# EAGLE board TSC_PROIECT_BOARD (EAGLE 9.7.0)
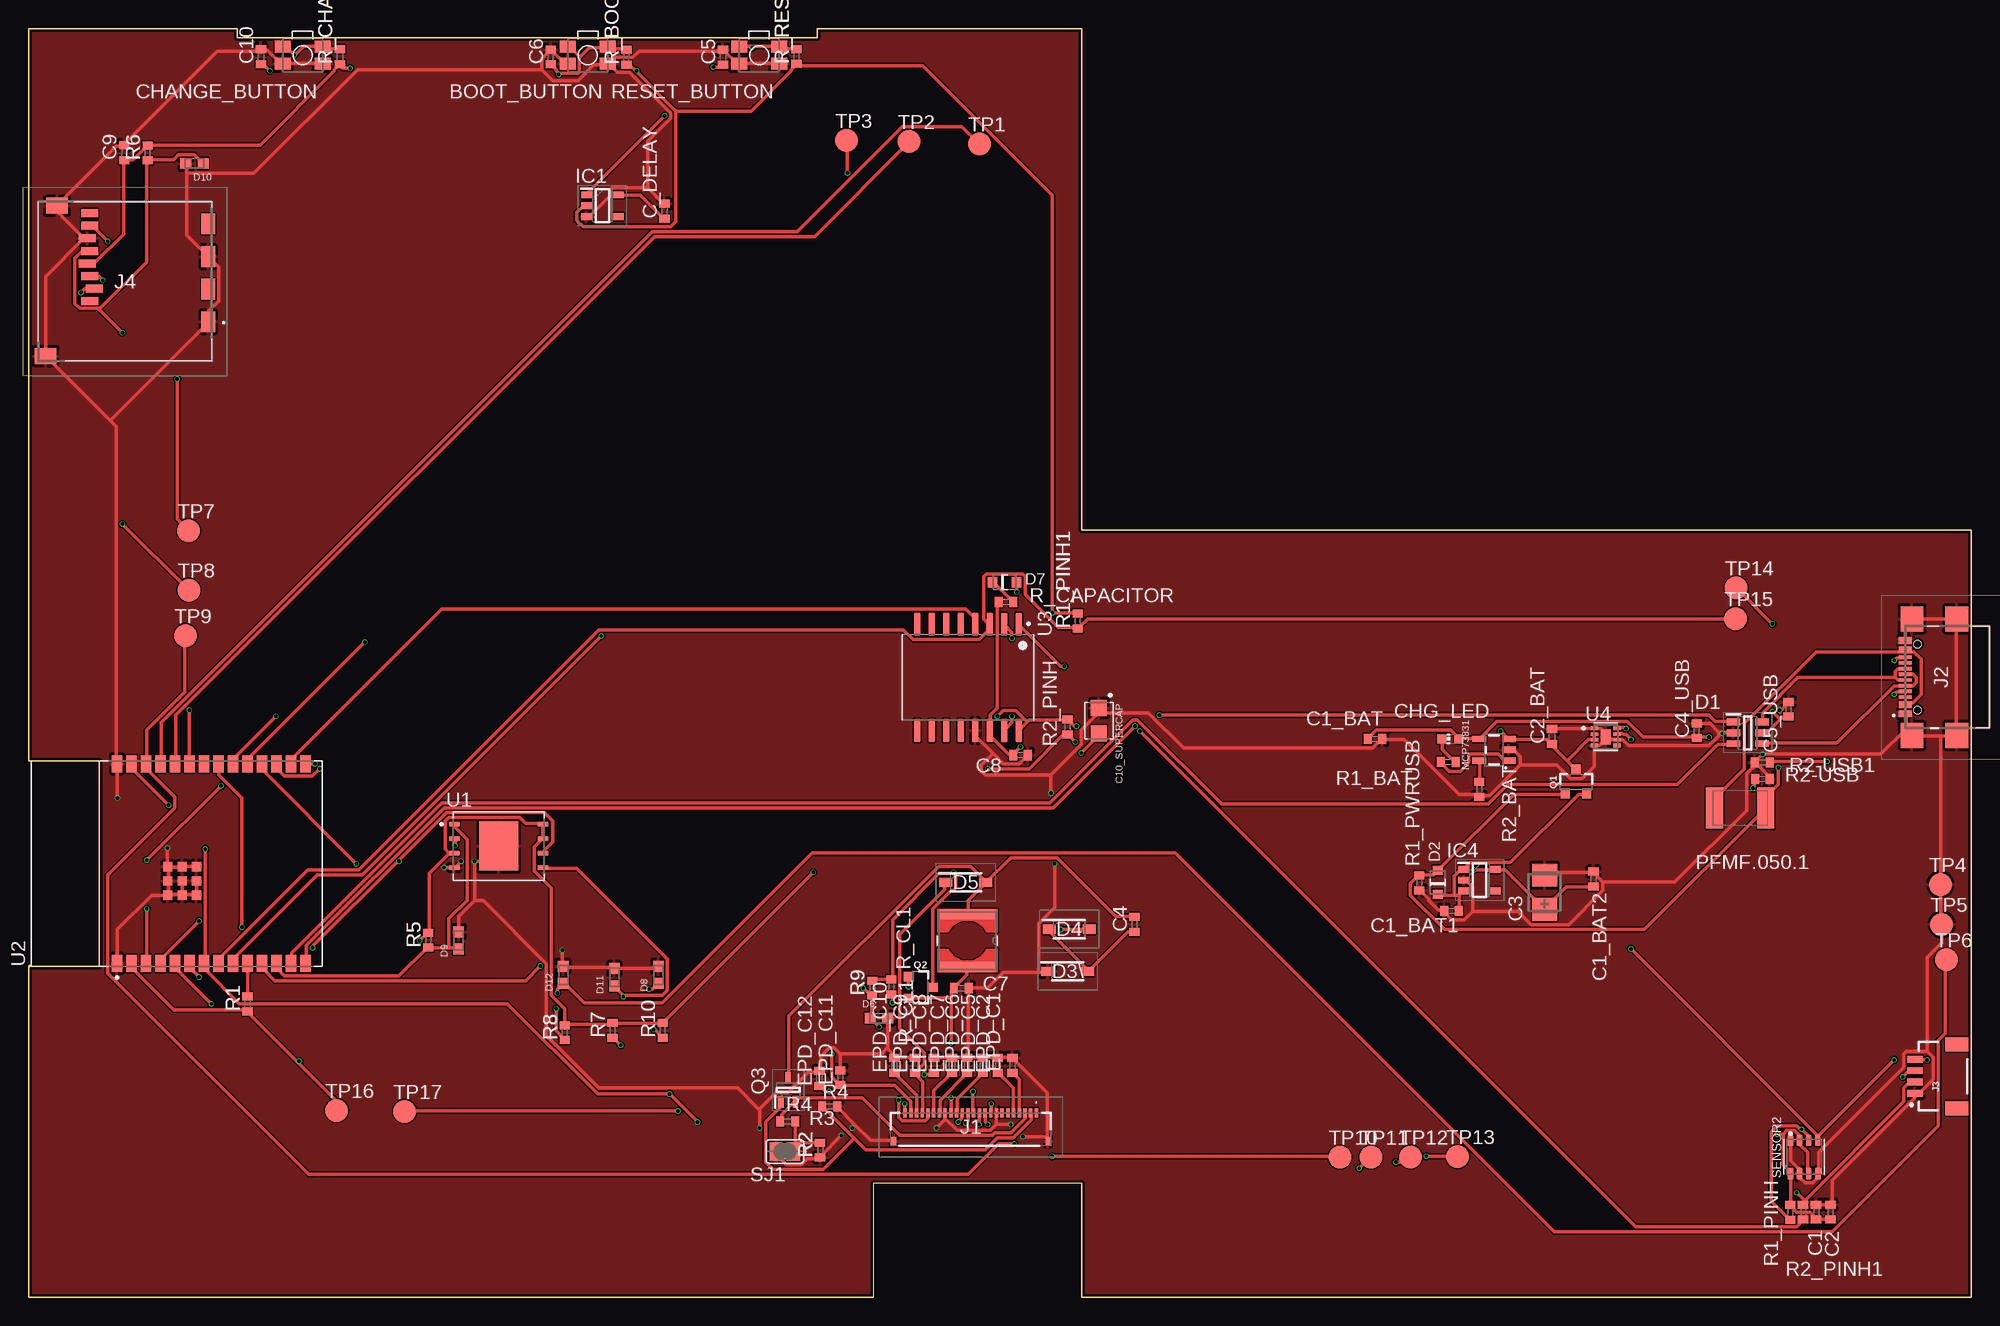
[diagram p0: board, top side]
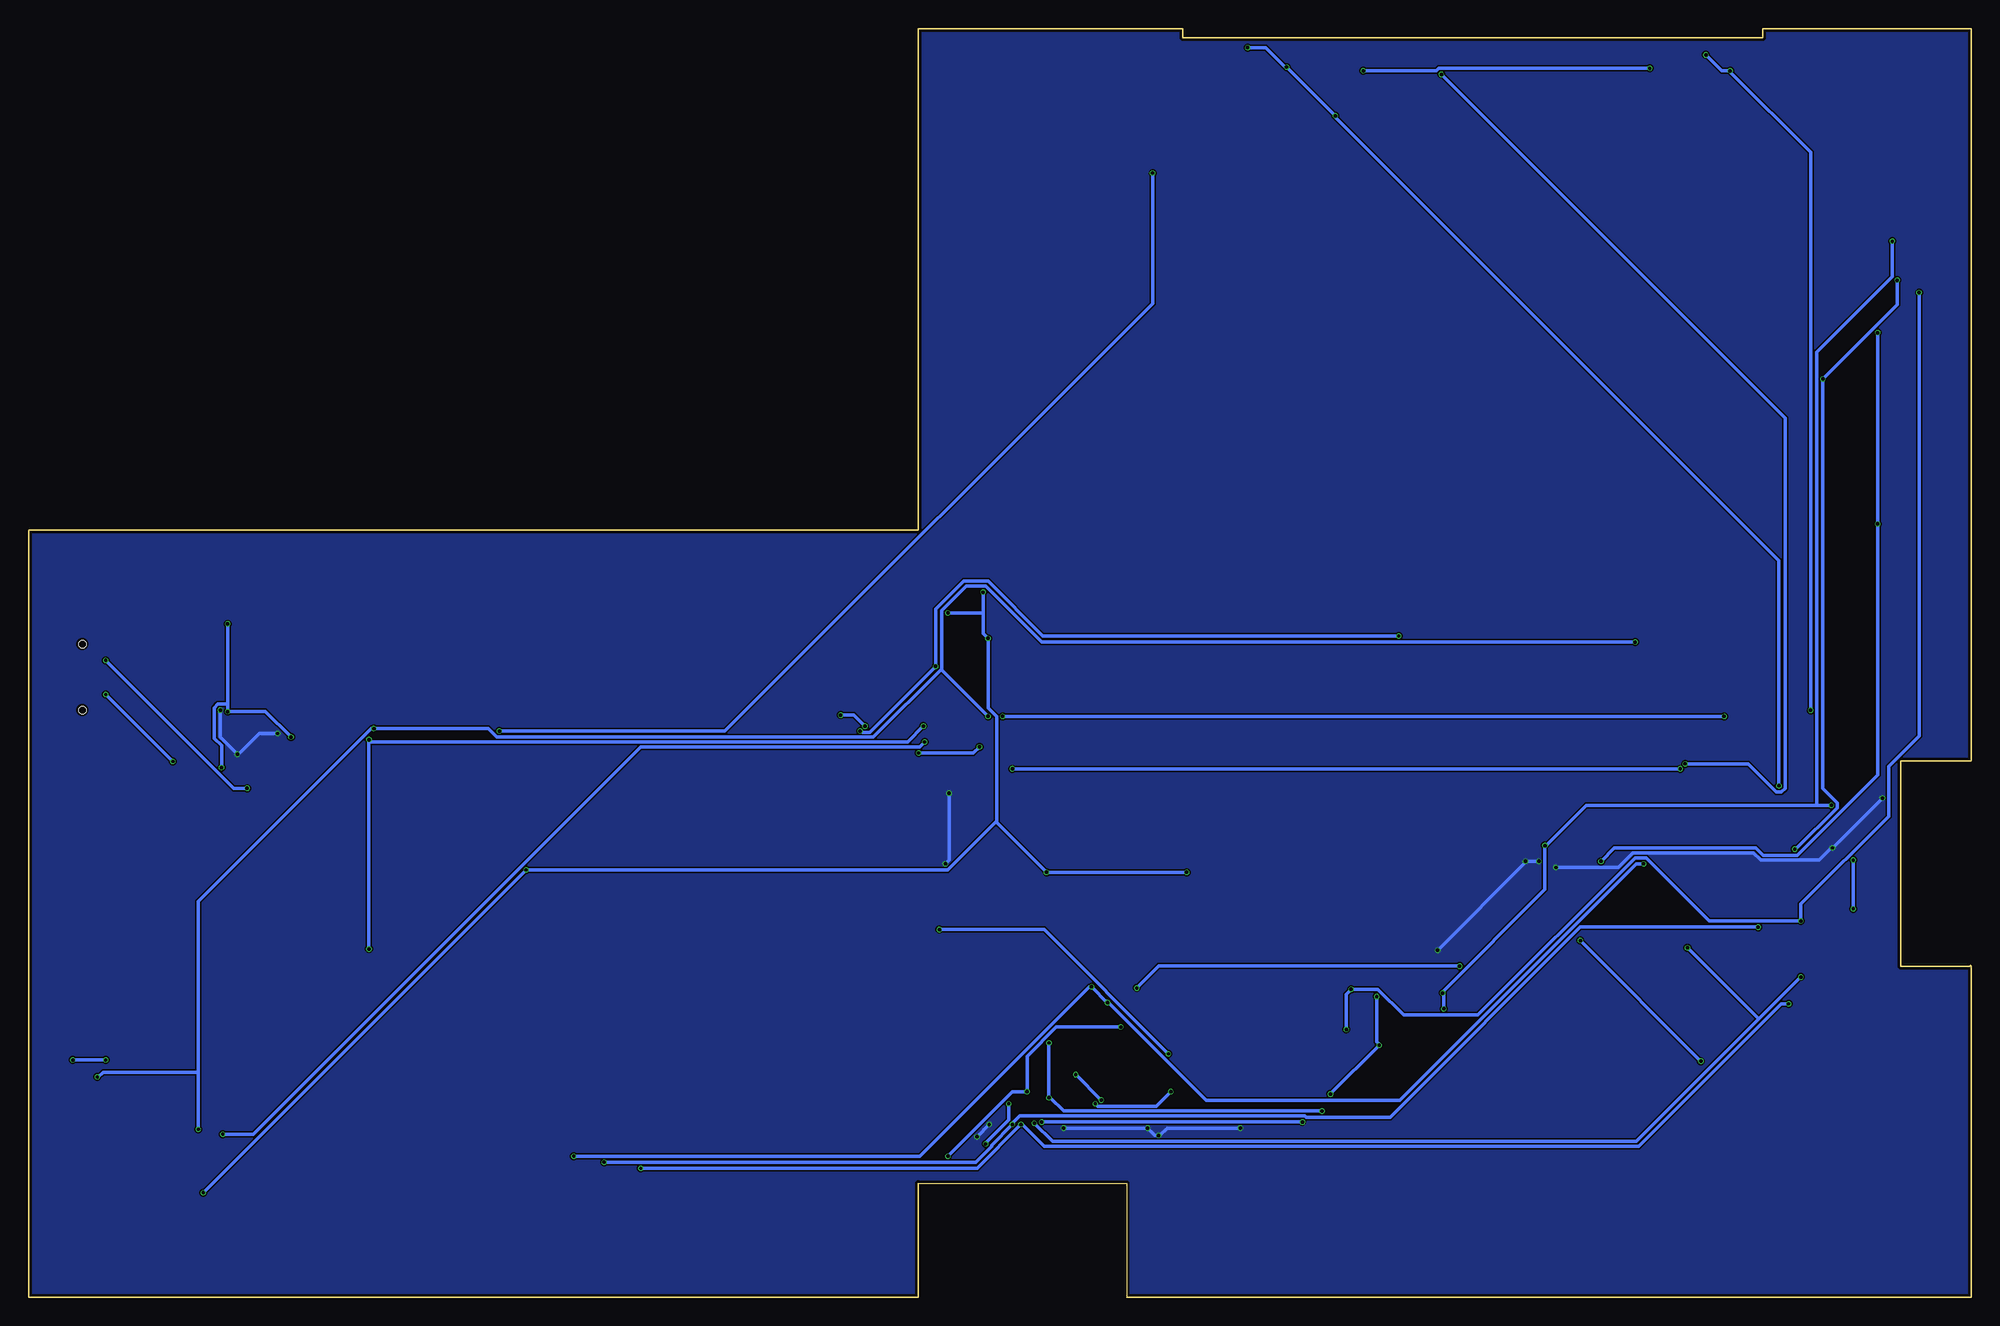
[diagram p1: board, bottom side, seen from below]

Size 170.2 x 111.2 mm. Coordinates in mm from the lower left corner, seen from the top.
Outline: 0,29 0,0 74,0 74,10 92.27,10 92.27,0 170.2,0 170.2,67.24 92.27,67.24 92.27,111.2 69.1,111.2 69.1,110.4 18.3,110.4 18.3,111.2 0,111.2 0,47 6.2,47 6.2,29 0,29
Outline: 0,29 0.1,29.1
Copper layers (1*16): Top 0.035mm / dielectric 1.6mm / Bottom 0.035mm
Design rules "jlcpcb-2layers.dru": minimum track width 0.15mm, minimum drill 0.3mm, track to track 5mil, track to pad 5mil, pad to pad 5mil, via to via 5mil, smd to smd 5mil, copper to edge 0.2mm, drill to drill 6mil, minimum pad ring 10mil, minimum via ring 3mil, stop-mask expansion 4mil, vias tented up to drill 0mil, thermal gap 10mil
Net classes: 0 default: width 0.3 mm; 1 power: width 0.3 mm

## Footprints (pad centres in the part's own frame; a part is rotated, then mirrored left to right if it is on the bottom)
MYBUTTON = smd 1.4 x 1.05: 1 1.75,0.75; 2 -1.75,0.75; 3 -1.75,-0.75; 4 1.75,-0.75
ESP32_WROVER_EAGLE-LTSPICE_C0402 = smd 0.7 x 0.9: 1 -0.65,0; 2 0.65,0
RCL_CT3528 = smd 2 x 2.2: + -1.5,0; - 1.5,0
CAPCP3225X100N = smd 1.4 x 1.4: 1 -1.1,0; 2 1.1,0
ADAFRUIT_CHIP-LED0603 = smd 0.8 x 0.8: A 0,-0.75; C 0,0.75
SOT95P280X145-6N = smd 1.2 x 0.6: 1 -1.25,0.95; 2 -1.25,0; 3 -1.25,-0.95; 4 1.25,-0.95; 5 1.25,0; 6 1.25,0.95
ESP32_WROVER_AVX---SD0805S020S1R0_AVX_SD0805S020S1R0_0 = smd 0.8 x 0.9: 1 -1.05,0; 2 1.05,0
SOD3716X135N = smd 1.15 x 0.8: 1 -1.75,0; 2 1.75,0
DIOC1608X36N = smd 0.97 x 0.94: 1 -0.75,0; 2 0.75,0
SOT95P280X125-5N = smd 0.9 x 0.6: 1 -1.4,0.95; 2 -1.4,0; 3 -1.4,-0.95; 4 1.4,-0.95; 5 1.4,0.95
SOT95P280X120-5N = smd 0.9 x 0.6: 1 -1.4,0.95; 2 -1.4,0; 3 -1.4,-0.95; 4 1.4,-0.95; 5 1.4,0.95
FH34SRJ24S05SH99 = smd 0.3 x 0.8: 1 5.75,1.45; 2 5.25,1.45; 3 4.75,1.45; 4 4.25,1.45; 5 3.75,1.45; 6 3.25,1.45; 7 2.75,1.45; 8 2.25,1.45; 9 1.75,1.45; 10 1.25,1.45; 11 0.75,1.45; 12 0.25,1.45; 13 -0.25,1.45; 14 -0.75,1.45; 15 -1.25,1.45; 16 -1.75,1.45; 17 -2.25,1.45; 18 -2.75,1.45; 19 -3.25,1.45; 20 -3.75,1.45; 21 -4.25,1.45; 22 -4.75,1.45; 23 -5.25,1.45; 24 -5.75,1.45 | smd 0.4 x 0.8: MP1 6.75,-1.05; MP2 -6.75,-1.05
SAMACSYS_PARTS_USB4110GFA = smd 0.3 x 1.15: A1 -3.35,3.678; A4 -2.55,3.678; A5 -1.25,3.678; A6 -0.25,3.678; A7 0.25,3.678; A8 1.25,3.678; A9 2.55,3.678; A12 3.35,3.678; B1 3.05,3.678; B4 2.25,3.678; B5 1.75,3.678; B6 0.75,3.678; B7 -0.75,3.678; B8 -1.75,3.678; B9 -2.25,3.678; B12 -3.05,3.678 | smd 2.18 x 2: MP1 -5.11,-0.827; MP2 5.11,-0.827; MP3 -5.11,3.103; MP4 5.11,3.103 | hole 0.65: -2.89,2.603; 2.89,2.603
JST04_1MM_RA = smd 0.6 x 1.35: 1 -1.5,0; 2 -0.5,0; 3 0.5,0; 4 1.5,0 | smd 1.2 x 2: NC1 2.8,-3.675; NC2 -2.8,-3.675
112ATAARR03ATTEND = smd 1.8 x 1.2: G1 10.6,10.4; G2 4.9,10.4; S1 7.75,10.4; S2 2.05,10.4 | smd 1.4 x 1.9: G3 13.6,-3.85; G4 0.45,-2.85 | smd 0.7 x 1.5: P1 8.8,0; P2 7.7,0.4; P3 6.6,0; P4 5.5,-0.2; P5 4.4,0; P6 3.3,-0.2; P7 2.2,0; P8 1.1,0
IND_4828-WE-TPC_WRE = smd 0.889 x 4.826: 1 -2.286,0; 2 2.286,0
ESP32_WROVER_SPARKFUN-IC-POWER_SOT23-5 = smd 0.55 x 1.2: 1 -0.95,-1.3; 2 0,-1.3; 3 0.95,-1.3; 4 0.95,1.3; 5 -0.95,1.3
ESP32C6_VARISTOR_CT/CN1812 = smd 1.5 x 3.6: 1 -2.25,0; 2 2.25,0
ESP32_WROVER_SPARKFUN-DISCRETESEMI_SOT23-3 = smd 0.8 x 0.9: 1 -0.95,-1; 2 0.95,-1; 3 0,1.1
SOT65P210X110-3N = smd 1.05 x 0.5: 1 -1.05,0.65; 2 -1.05,-0.65; 3 1.05,0
ESP32_WROVER_EAGLE-LTSPICE_R0402 = smd 0.7 x 0.9: 1 -0.65,0; 2 0.65,0
ESP32_WROVER_BME680_PSON80P300X300X100-8N = smd 1.016 x 0.5: 1 1.458,1.2; 2 1.458,0.4; 3 1.458,-0.4; 4 1.458,-1.2; 5 -1.458,-1.22; 6 -1.458,-0.4; 7 -1.458,0.4; 8 -1.458,1.2
SJ = smd 1.168 x 1.6: 1 -0.762,0; 2 0.762,0
TP20R = smd 2 x 2: TP 0,0
SON127P600X800X80-9N = smd 0.94 x 0.44: 1 -3.895,1.905; 2 -3.895,0.635; 3 -3.895,-0.635; 4 -3.895,-1.905; 5 3.895,-1.905; 6 3.895,-0.635; 7 3.895,0.635; 8 3.895,1.905 | smd 3.4 x 4.3: 9 0,0
XCVR_ESP32-C6-WROOM-1-N8 = smd 1.5 x 0.9: 1 -8.75,5.26; 2 -8.75,3.99; 3 -8.75,2.72; 4 -8.75,1.45; 5 -8.75,0.18; 6 -8.75,-1.09; 7 -8.75,-2.36; 8 -8.75,-3.63; 9 -8.75,-4.9; 10 -8.75,-6.17; 11 -8.75,-7.44; 12 -8.75,-8.71; 13 -8.75,-9.98; 14 -8.75,-11.25; 15 8.75,-11.25; 16 8.75,-9.98; 17 8.75,-8.71; 18 8.75,-7.44; 19 8.75,-6.17; 20 8.75,-4.9; 21 8.75,-3.63; 22 8.75,-2.36; 23 8.75,-1.09; 24 8.75,0.18; 25 8.75,1.45; 26 8.75,2.72; 27 8.75,3.99; 28 8.75,5.26 | smd 0.8 x 0.8: 29_1 -2.755,0.79; 29_2 -1.505,0.79; 29_3 -0.255,0.79; 29_4 -2.755,-0.46; 29_5 -1.505,-0.46; 29_6 -0.255,-0.46; 29_7 -2.755,-1.71; 29_8 -1.505,-1.71; 29_9 -0.255,-1.71
SOIC127P1032X265-16N = smd 2.05 x 0.59: 1 -4.655,4.445; 2 -4.655,3.175; 3 -4.655,1.905; 4 -4.655,0.635; 5 -4.655,-0.635; 6 -4.655,-1.905; 7 -4.655,-3.175; 8 -4.655,-4.445; 9 4.655,-4.445; 10 4.655,-3.175; 11 4.655,-1.905; 12 4.655,-0.635; 13 4.655,0.635; 14 4.655,1.905; 15 4.655,3.175; 16 4.655,4.445
SON50P200X200X80-9N = smd 0.762 x 0.3: 1 -0.985,0.75 | smd 0.76 x 0.3: 2 -0.985,0.25; 3 -0.985,-0.25; 4 -0.985,-0.75; 5 0.985,-0.75; 6 0.985,-0.25; 7 0.985,0.25; 8 0.985,0.75 | smd 0.9 x 1.3: 9 0,0

## Placement (x,y rotation side)
BOOT_BUTTON  BUTTON_CUSYOMV1  [MYBUTTON]  49,108.85 180 top
C1  100nF  [ESP32_WROVER_EAGLE-LTSPICE_C0402]  156.59,7.48 90 top
C1_BAT  4.7uF  [ESP32_WROVER_EAGLE-LTSPICE_C0402]  117.95,48.95 0 top
C1_BAT1  4.7uF  [ESP32_WROVER_EAGLE-LTSPICE_C0402]  124.65,33.87 180 top
C1_BAT2  4.7uF  [ESP32_WROVER_EAGLE-LTSPICE_C0402]  137.09,36.67 90 top
C2  100nF  [ESP32_WROVER_EAGLE-LTSPICE_C0402]  157.86,7.49 90 top
C2_BAT  4.7uF  [ESP32_WROVER_EAGLE-LTSPICE_C0402]  133.46,49.15 90 top
C3  100uF TANT  [RCL_CT3528]  132.81,35.5 90 top
C4  4.7uF/25V  [ESP32_WROVER_EAGLE-LTSPICE_C0402]  96.89,32.69 90 top
C4_USB  100nF  [ESP32_WROVER_EAGLE-LTSPICE_C0402]  146.13,49.67 90 top
C5  1uF  [ESP32_WROVER_EAGLE-LTSPICE_C0402]  60.83,108.69 90 top
C5_USB  4.7uF  [ESP32_WROVER_EAGLE-LTSPICE_C0402]  154.18,51.55 90 top
C6  100nF  [ESP32_WROVER_EAGLE-LTSPICE_C0402]  45.75,108.71 90 top
C7  10uF  [ESP32_WROVER_EAGLE-LTSPICE_C0402]  81.72,27.11 0 top
C8  100nF  [ESP32_WROVER_EAGLE-LTSPICE_C0402]  86.9,47.53 0 top
C9  100nF  [ESP32_WROVER_EAGLE-LTSPICE_C0402]  8.38,100.33 90 top
C10  100nF  [ESP32_WROVER_EAGLE-LTSPICE_C0402]  20.36,108.73 90 top
C10_SUPERCAP  CPH3225A  [CAPCP3225X100N]  93.76,50.54 270 top
C_DELAY  100nF  [ESP32_WROVER_EAGLE-LTSPICE_C0402]  55.71,95.19 90 top
CHANGE_BUTTON  BUTTON_CUSYOMV1  [MYBUTTON]  24.01,108.85 180 top
CHG_LED  [ADAFRUIT_CHIP-LED0603]  124.54,48.95 90 top
D1  USBLC6-2SC6Y  [SOT95P280X145-6N]  150.6,49.47 0 top
D2  ESP32_WROVER_AVX---SD0805S020S1R0_AVX_SD0805S020S1R0_0_0AVX_SD0805S020S1R0_0_0  [ESP32_WROVER_AVX---SD0805S020S1R0_AVX_SD0805S020S1R0_0]  123.44,36.38 90 top
D3\  MBR0530  [SOD3716X135N]  91.03,28.58 0 top
D4  MBR0530  [SOD3716X135N]  91.17,32.28 0 top
D5  MBR0530  [SOD3716X135N]  82.11,36.38 0 top
D6  PGB1010603MR  [DIOC1608X36N]  74.5,24.47 0 top
D7  ESP32_WROVER_AVX---SD0805S020S1R0_AVX_SD0805S020S1R0_0_0AVX_SD0805S020S1R0_0_0  [ESP32_WROVER_AVX---SD0805S020S1R0_AVX_SD0805S020S1R0_0]  85.49,62.68 0 top
D8  PGB1010603MR  [DIOC1608X36N]  55.18,28.27 90 top
D9  PGB1010603MR  [DIOC1608X36N]  37.67,31.29 90 top
D10  PGB1010603MR  [DIOC1608X36N]  14.54,99.37 180 top
D11  PGB1010603MR  [DIOC1608X36N]  51.32,28.07 90 top
D12  PGB1010603MR  [DIOC1608X36N]  46.85,28.28 90 top
EPD_C1  1uF/50V  [ESP32_WROVER_EAGLE-LTSPICE_C0402]  86.19,20.35 90 top
EPD_C2  1uF/50V  [ESP32_WROVER_EAGLE-LTSPICE_C0402]  84.91,20.33 90 top
EPD_C5  0.1uF/50V  [ESP32_WROVER_EAGLE-LTSPICE_C0402]  83.59,20.33 90 top
EPD_C6  1uF/50V  [ESP32_WROVER_EAGLE-LTSPICE_C0402]  82.2,20.35 90 top
EPD_C7  1uF/50V  [ESP32_WROVER_EAGLE-LTSPICE_C0402]  80.9,20.35 90 top
EPD_C8  1uF/50V  [ESP32_WROVER_EAGLE-LTSPICE_C0402]  79.32,20.33 90 top
EPD_C9  1uF/50V  [ESP32_WROVER_EAGLE-LTSPICE_C0402]  77.65,20.33 90 top
EPD_C10  1uF/50V  [ESP32_WROVER_EAGLE-LTSPICE_C0402]  75.85,20.34 90 top
EPD_C11  1uF/50V  [ESP32_WROVER_EAGLE-LTSPICE_C0402]  71.11,19.27 90 top
EPD_C12  1uF/50V  [ESP32_WROVER_EAGLE-LTSPICE_C0402]  69.29,19.19 90 top
IC1  BD5229G-TR  [SOT95P280X125-5N]  50.27,95.67 0 top
IC4  XC6220A331MR-G  [SOT95P280X120-5N]  127.11,36.57 0 top
J1  FH34SRJ-24S-0.5SH_99_  [FH34SRJ24S05SH99]  82.54,14.74 0 top
J2  SAMACSYS_PARTS_USB4110-GF-A  [SAMACSYS_PARTS_USB4110GFA]  168.09,54.36 90 top
J3  QWIIC_RIGHT_ANGLE  [JST04_1MM_RA]  165.25,19.38 90 top
J4  112A-TAAR-R03_ATTEND  [112ATAARR03ATTEND]  5.35,96.11 270 top
L1  68uH  [IND_4828-WE-TPC_WRE]  82.25,31.27 270 top
MCP73831  ESP32_WROVER_SPARKFUN-IC-POWER_MCP73831  [ESP32_WROVER_SPARKFUN-IC-POWER_SOT23-5]  128.38,47.99 90 top
PFMF.050.1  ESP32C6_VARISTORCN1812  [ESP32C6_VARISTOR_CT/CN1812]  149.94,42.9 0 top
Q1  20V/4.2A/52mΩ/1.4W  [ESP32_WROVER_SPARKFUN-DISCRETESEMI_SOT23-3]  135.56,45.16 0 top
Q2  20V/4.2A/52mΩ/1.4W  [ESP32_WROVER_SPARKFUN-DISCRETESEMI_SOT23-3]  78.11,27.16 270 top
Q3  SI1308EDL-T1-GE3  [SOT65P210X110-3N]  66.54,18.18 90 top
R1  10K  [ESP32_WROVER_EAGLE-LTSPICE_R0402]  19.18,25.74 90 top
R1_BAT  200  [ESP32_WROVER_EAGLE-LTSPICE_R0402]  124.35,46.93 0 top
R1_PINH  10K  [ESP32_WROVER_EAGLE-LTSPICE_R0402]  154.33,7.47 90 top
R1_PINH1  10K  [ESP32_WROVER_EAGLE-LTSPICE_R0402]  91.91,59.29 90 top
R1_PWRUSB  100K  [ESP32_WROVER_EAGLE-LTSPICE_R0402]  121.82,36.34 90 top
R2  2.2  [ESP32_WROVER_EAGLE-LTSPICE_R0402]  69.34,12.91 90 top
R2-USB  5k1  [ESP32_WROVER_EAGLE-LTSPICE_R0402]  151.9,45.43 0 top
R2-USB1  5k1  [ESP32_WROVER_EAGLE-LTSPICE_R0402]  151.87,46.88 0 top
R2_BAT  2K  [ESP32_WROVER_EAGLE-LTSPICE_R0402]  127.09,44.53 90 top
R2_PINH  10K  [ESP32_WROVER_EAGLE-LTSPICE_R0402]  91.01,50 270 top
R2_PINH1  10K  [ESP32_WROVER_EAGLE-LTSPICE_R0402]  155.45,7.49 90 top
R3  0.47  [ESP32_WROVER_EAGLE-LTSPICE_R0402]  66.52,15.43 0 top
R4  10K  [ESP32_WROVER_EAGLE-LTSPICE_R0402]  70.2,16.75 0 top
R5  10K  [ESP32_WROVER_EAGLE-LTSPICE_R0402]  35.02,31.31 90 top
R6  10K  [ESP32_WROVER_EAGLE-LTSPICE_R0402]  10.44,100.3 90 top
R7  10K  [ESP32_WROVER_EAGLE-LTSPICE_R0402]  51.16,23.41 90 top
R8  10K  [ESP32_WROVER_EAGLE-LTSPICE_R0402]  46.98,23.21 90 top
R9  10K  [ESP32_WROVER_EAGLE-LTSPICE_R0402]  73.9,27.11 90 top
R10  10K  [ESP32_WROVER_EAGLE-LTSPICE_R0402]  55.56,23.41 90 top
R_BOOT  10K  [ESP32_WROVER_EAGLE-LTSPICE_R0402]  52.37,108.69 90 top
R_CAPACITOR  15  [ESP32_WROVER_EAGLE-LTSPICE_R0402]  85.62,60.94 0 top
R_CHANGE  10K  [ESP32_WROVER_EAGLE-LTSPICE_R0402]  27.28,108.72 90 top
R_CL1  10K  [ESP32_WROVER_EAGLE-LTSPICE_R0402]  75.58,27.23 270 top
R_RESET  10K  [ESP32_WROVER_EAGLE-LTSPICE_R0402]  67.27,108.75 90 top
RESET_BUTTON  BUTTON_CUSYOMV1  [MYBUTTON]  64,108.85 180 top
SENSOR2  ESP32_WROVER_BME680_BME680  [ESP32_WROVER_BME680_PSON80P300X300X100-8N]  155.54,12.32 90 top
SJ1  [SJ]  66.26,12.79 0 top
TP1  TPTP20R  [TP20R]  83.31,101.09 0 top
TP2  TPTP20R  [TP20R]  77.13,101.29 0 top
TP3  TPTP20R  [TP20R]  71.65,101.39 0 top
TP4  TPTP20R  [TP20R]  167.47,36.19 0 top
TP5  TPTP20R  [TP20R]  167.59,32.69 0 top
TP6  TPTP20R  [TP20R]  168.01,29.59 0 top
TP7  TPTP20R  [TP20R]  14.03,67.19 0 top
TP8  TPTP20R  [TP20R]  14.05,61.99 0 top
TP9  TPTP20R  [TP20R]  13.77,57.99 0 top
TP10  TPTP20R  [TP20R]  114.87,12.3 0 top
TP11  TPTP20R  [TP20R]  117.59,12.29 0 top
TP12  TPTP20R  [TP20R]  121.08,12.31 0 top
TP13  TPTP20R  [TP20R]  125.18,12.34 0 top
TP14  TPTP20R  [TP20R]  149.59,62.19 0 top
TP15  TPTP20R  [TP20R]  149.54,59.49 0 top
TP16  TPTP20R  [TP20R]  26.99,16.39 0 top
TP17  TPTP20R  [TP20R]  32.94,16.29 0 top
U1  W25Q512JVEIQ  [SON127P600X800X80-9N]  41.19,39.56 0 top
U2  ESP32-C6-WROOM-1-N8  [XCVR_ESP32-C6-WROOM-1-N8]  13,38.01 90 top
U3  DS3231SN#  [SOIC127P1032X265-16N]  82.3,54.35 270 top
U4  MAX17048G+T10  [SON50P200X200X80-9N]  138.17,49.12 0 top

## Library data of the parts
BOOT_BUTTON CHANGE_BUTTON CHG_LED PFMF.050.1 RESET_BUTTON SJ1 TP1-TP17 = DeskAssistant v19 v1
C1 C1_BAT C1_BAT1 C1_BAT2 C2 C2_BAT C4 C4_USB C5 C5_USB C6-C10 C_DELAY EPD_C1 EPD_C2 EPD_C5-EPD_C12 = DeskAssistant v19 v1; SPICEMODEL: NONE; SPICEPREFIX: C
C3 = DeskAssistant v19 v1; SPICEPREFIX: C
C10_SUPERCAP = DeskAssistant v19 v1; AVAILABILITY: Not in stock; CHECK_PRICES: https://www.snapeda.com/parts/CPH3225A/Seiko+Instruments/view-part/?ref=eda; DESCRIPTION: 11 mF (EDLC) Supercapacitor 3.3 V 1210 (3225 Metric) - -; MF: Seiko Instruments; MP: CPH3225A; PACKAGE: 1210 Seiko; PRICE: None; PURCHASE-URL: https://www.snapeda.com/api/url_track_click_mouser/?unipart_id=562593&manufacturer=Seiko Instruments&part_name=CPH3225A&search_term=None; SNAPEDA_LINK: https://www.snapeda.com/parts/CPH3225A/Seiko+Instruments/view-part/?ref=snap
D1 = DeskAssistant v19 v1; AVAILABILITY: In Stock; CHECK_PRICES: https://www.snapeda.com/parts/USBLC6-2SC6Y/STMicroelectronics/view-part/?ref=eda; DESCRIPTION: 17V Clamp 5A (8/20µs) Ipp Tvs Diode Surface Mount SOT-23-6; MF: STMicroelectronics; MP: USBLC6-2SC6Y; PACKAGE: SOT-23-6 STMicroelectronics; PRICE: None; SNAPEDA_LINK: https://www.snapeda.com/parts/USBLC6-2SC6Y/STMicroelectronics/view-part/?ref=snap
D2 D7 = DeskAssistant v19 v1; CENTROID_NOT_SPECIFIED: No; DATASHEET: http://datasheets.avx.com/schottky.pdf; DIGIKEY_DESCRIPTION: DIODE SCHOTTKY 20V 1A 0805; DIGIKEY_PART_NUMBER: 478-7800-1-ND; LEAD_FREE: yes; MF: AVX; MOUSER_PART_NUMBER: 581-SD0805S020S1R0; PACKAGE: 0805 (2012 metric); PREFIX: D; ROHS: yes; TEMPERATURE_RANGE_HIGH: +125°C; TEMPERATURE_RANGE_LOW: -55°C
D3\ D4 D5 = DeskAssistant v19 v1; AVAILABILITY: In Stock; CHECK_PRICES: https://www.snapeda.com/parts/MBR0530/Onsemi/view-part/?ref=eda; DESCRIPTION: Diode Schottky 30 V 500mA Surface Mount SOD-123; MF: ON Semiconductor; MP: MBR0530; PACKAGE: SOD-123-2 ON Semiconductor; PRICE: None; PURCHASE-URL: https://www.snapeda.com/api/url_track_click_mouser/?unipart_id=179458&manufacturer=ON Semiconductor&part_name=MBR0530&search_term=None; SNAPEDA_LINK: https://www.snapeda.com/parts/MBR0530/Onsemi/view-part/?ref=snap
D6 D8-D12 = DeskAssistant v19 v1; AVAILABILITY: In Stock; CHECK_PRICES: https://www.snapeda.com/parts/PGB1010603MR/Littelfuse/view-part/?ref=eda; DESCRIPTION: 150V (Typ) Clamp - Ipp Tvs Diode Surface Mount 0603 (1608 Metric); MF: Littelfuse Inc.; MP: PGB1010603MR; PACKAGE: 0603 Littelfuse Inc.; PRICE: None; PURCHASE-URL: https://www.snapeda.com/api/url_track_click_mouser/?unipart_id=5659453&manufacturer=Littelfuse Inc.&part_name=PGB1010603MR&search_term=None; SNAPEDA_LINK: https://www.snapeda.com/parts/PGB1010603MR/Littelfuse/view-part/?ref=snap
IC1 = DeskAssistant v19 v1; DESCRIPTION: Voltage Detector with Adjustable Delay Time: CMOS processes are utilized to develop high precision, low current consumption CMOS reset ICs that allow arbitrary setting of the delay time. The extensive lineup includes both Nch Open Drain and CMOS output types in a wide range of detection voltages (from 2.3V to 6.0V, in 0.1V steps), enabling selection of the ideal solution based on customer requirements. In addition, the entire series is of course both lead-free and RoHS-compliant.; HEIGHT: 1.25mm; MANUFACTURER_NAME: ROHM Semiconductor; MANUFACTURER_PART_NUMBER: BD5229G-TR; MOUSER_PART_NUMBER: 755-BD5229G-TR; MOUSER_PRICE-STOCK: https://www.mouser.co.uk/ProductDetail/ROHM-Semiconductor/BD5229G-TR?qs=4kLU8WoGk0vvnhrrYwdszw%3D%3D
IC4 = DeskAssistant v19 v1; DESCRIPTION: LDO Voltage Regulators; HEIGHT: 1.2mm; MANUFACTURER_NAME: Torex; MANUFACTURER_PART_NUMBER: XC6220A331MR-G; MOUSER_PART_NUMBER: 865-XC6220A331MR-G; MOUSER_PRICE-STOCK: https://www.mouser.co.uk/ProductDetail/Torex-Semiconductor/XC6220A331MR-G?qs=AsjdqWjXhJ8ZSWznL1J0gg%3D%3D
J1 = DeskAssistant v19 v1; DESCRIPTION: 24 Position FFC, FPC Connector Contacts, Top and Bottom 0.020" (0.50mm) Surface Mount, Right Angle; HEIGHT: 1.1mm; MANUFACTURER_NAME: Hirose; MANUFACTURER_PART_NUMBER: FH34SRJ-24S-0.5SH(99); MOUSER_PART_NUMBER: 798-FH34SRJ24S05SH99; MOUSER_PRICE-STOCK: https://www.mouser.co.uk/ProductDetail/Hirose-Connector/FH34SRJ-24S-0.5SH99?qs=vcbW%252B4%252BSTIpKBl5ap9J8Fw%3D%3D
J2 = DeskAssistant v19 v1; DESCRIPTION: CONN USB 2.0 TYPE-C R/A SMT; HEIGHT: 3.26mm; MANUFACTURER_NAME: GCT (GLOBAL CONNECTOR TECHNOLOGY); MANUFACTURER_PART_NUMBER: USB4110-GF-A; MOUSER_PART_NUMBER: 640-USB4110-GF-A; MOUSER_PRICE-STOCK: https://www.mouser.co.uk/ProductDetail/GCT/USB4110-GF-A?qs=KUoIvG%2F9IlYiZvIXQjyJeA%3D%3D
J3 = DeskAssistant v19 v1; PROD_ID: CONN-13694
J4 = DeskAssistant v19 v1; DESCRIPTION: Micro SD Card Socket, Push-Push Type, Top Mount, SMT, H=1.83mm, 10u; HEIGHT: 1.9mm; MANUFACTURER_NAME: ATTEND; MANUFACTURER_PART_NUMBER: 112A-TAAR-R03 ATTEND
L1 = DeskAssistant v19 v1; COPYRIGHT: Copyright (C) 2024 Ultra Librarian. All rights reserved.; MANUFACTURER_PART_NUMBER: 744043680; MFR_NAME: Wurth Electronics
MCP73831 = DeskAssistant v19 v1; PROD_ID: IC-09995
Q1 Q2 = DeskAssistant v19 v1; PROD_ID: TRAN-14388
Q3 = DeskAssistant v19 v1; AVAILABILITY: In Stock; CHECK_PRICES: https://www.snapeda.com/parts/SI1308EDL-T1-GE3/Vishay+Siliconix/view-part/?ref=eda; DESCRIPTION: Si1308EDL-T1-GE3 N-channel MOSFET Transistor, 1.5 A, 30 V, 3-Pin SC-70 | Siliconix / Vishay SI1308EDL-T1-GE3; MF: Vishay Siliconix; MP: SI1308EDL-T1-GE3; PACKAGE: SOT-323 Vishay Semiconductor; PRICE: None; PURCHASE-URL: https://www.snapeda.com/api/url_track_click_mouser/?unipart_id=274603&manufacturer=Vishay Siliconix&part_name=SI1308EDL-T1-GE3&search_term=None; SNAPEDA_LINK: https://www.snapeda.com/parts/SI1308EDL-T1-GE3/Vishay+Siliconix/view-part/?ref=snap
R1 R1_BAT R1_PINH R1_PINH1 R1_PWRUSB R2 R2-USB R2-USB1 R2_BAT R2_PINH R2_PINH1 R3-R10 R_BOOT R_CAPACITOR R_CHANGE R_CL1 R_RESET = DeskAssistant v19 v1; SPICEMODEL: NONE; SPICEPREFIX: R
SENSOR2 = DeskAssistant v19 v1; AVAILABILITY: Unavailable; DESCRIPTION: Integrated Environmental Unit; MF: Bosch Sensortec; MP: BME680; PACKAGE: LGA-8 Bosch Tools; PRICE: None
U1 = DeskAssistant v19 v1; AVAILABILITY: In Stock; CHECK_PRICES: https://www.snapeda.com/parts/W25Q512JVEIQ/Winbond+Electronics/view-part/?ref=eda; DESCRIPTION: FLASH - NOR Memory IC 512Mb (64M x 8) SPI - Quad I/O 133 MHz 8-WSON (8x6); MF: Winbond Electronics; MP: W25Q512JVEIQ; PACKAGE: Package; PRICE: None; SNAPEDA_LINK: https://www.snapeda.com/parts/W25Q512JVEIQ/Winbond+Electronics/view-part/?ref=snap
U2 = DeskAssistant v19 v1; AVAILABILITY: In Stock; CHECK_PRICES: https://www.snapeda.com/parts/ESP32-C6-WROOM-1-N8/Espressif+Systems/view-part/?ref=eda; DESCRIPTION: Multiprotocol Modules ESP32-C6 module, Wi-Fi 6 in 2.4 GHz band, Bluetooth 5, Zigbee 3.0 and Thread. ESP34-WROOM Compatible - ENGINEERING SAMPLE; MF: Espressif Systems; MP: ESP32-C6-WROOM-1-N8; PACKAGE: None; PRICE: None; SNAPEDA_LINK: https://www.snapeda.com/parts/ESP32-C6-WROOM-1-N8/Espressif+Systems/view-part/?ref=snap
U3 = DeskAssistant v19 v1; AVAILABILITY: In Stock; CHECK_PRICES: https://www.snapeda.com/parts/DS3231SN%23/Analog+Devices/view-part/?ref=eda; DESCRIPTION: Extremely Accurate I²C-Integrated RTC/TCXO/Crystal; MF: Analog Devices; MP: DS3231SN#; PACKAGE: SOIC-16 Maxim; PRICE: None; PURCHASE-URL: https://www.snapeda.com/api/url_track_click_mouser/?unipart_id=99048&manufacturer=Analog Devices&part_name=DS3231SN#&search_term=None; SNAPEDA_LINK: https://www.snapeda.com/parts/DS3231SN%23/Analog+Devices/view-part/?ref=snap
U4 = DeskAssistant v19 v1; AVAILABILITY: In Stock; CHECK_PRICES: https://www.snapeda.com/parts/MAX17048G+T10/Analog+Devices/view-part/?ref=eda; DESCRIPTION: 3µA 1-Cell/2-Cell Fuel Gauge with ModelGauge; MF: Analog Devices; MP: MAX17048G+T10; PACKAGE: TDFN-8 Maxim; PRICE: None; PURCHASE-URL: https://www.snapeda.com/api/url_track_click_mouser/?unipart_id=329239&manufacturer=Analog Devices&part_name=MAX17048G+T10&search_term=None; SNAPEDA_LINK: https://www.snapeda.com/parts/MAX17048G+T10/Analog+Devices/view-part/?ref=snap

## Nets
3V3 [power]: C1_BAT2.1 C3.+ C9.1 D7.2 IC1.2 IC4.5 J3.2 J4.P4 Q2.3 R1.1 R1_PINH1.2 R2_PINH1.2 R5.2 R6.2 R7.2 R8.2 R9.2 R10.2 R_BOOT.1 R_CHANGE.1 R_CL1.1 R_RESET.1 TP16.TP U1.3 U1.7 U1.8 U2.2 U3.2
32KHZ: R2_PINH1.1 U2.9 U3.1
DN: D1.4 J2.A7 J2.B7
DP: D1.6 J2.A6 J2.B6
EPD_3V3 [power]: C7.1 J1.16 L1.2 Q2.2 TP17.TP
EPD_3V3_C [power]: Q2.1 R_CL1.2 TP13.TP U2.18
EPD_BUSY: J1.9 TP9.TP U2.26
EPD_CS: D6.1 J1.12 R9.1 TP10.TP U2.11
EPD_DC: J1.11 TP11.TP U2.5
EPD_RST: J1.10 TP12.TP U2.21
FLASH_CS: D9.1 R5.1 U1.1 U2.12
GDR: J1.2 Q3.1 R4.1
GND: BOOT_BUTTON.1 BOOT_BUTTON.2 C1.2 C1_BAT1.2 C1_BAT2.2 C1_BAT.2 C2.2 C2_BAT.2 C3.- C4_USB.2 C5.2 C5_USB.2 C6.2 C7.2 C8.2 C9.2 C10.2 C10_SUPERCAP.1 C_DELAY.2 CHANGE_BUTTON.1 CHANGE_BUTTON.2 D1.2 D3\.1 D6.2 D8.2 D9.2 D10.2 D11.2 D12.2 EPD_C1.2 EPD_C2.2 EPD_C5.2 EPD_C6.2 EPD_C7.2 EPD_C8.2 EPD_C9.2 EPD_C10.2 EPD_C11.2 EPD_C12.2 IC1.3 IC4.2 J1.8 J1.17 J1.MP1 J1.MP2 J2.A1 J2.A12 J2.B1 J2.B12 J2.MP1 J2.MP2 J2.MP3 J2.MP4 J3.1 J4.G1 J4.G2 J4.G3 J4.G4 J4.P6 MCP73831.2 R1_PWRUSB.1 R2-USB1.1 R2-USB.2 R2.1 R2_BAT.1 R4.2 RESET_BUTTON.1 RESET_BUTTON.2 SENSOR2.1 SENSOR2.5 SENSOR2.7 SJ1.1 TP4.TP TP5.TP U1.4 U1.9 U2.1 U2.28 U2.29_1 U2.29_2 U2.29_3 U2.29_4 U2.29_5 U2.29_6 U2.29_7 U2.29_8 U2.29_9 U3.13 U4.1 U4.4 U4.6 U4.9
GPIO8: R1.2 U2.10
I2C_PW: C1.1 C2.1 R1_PINH.2 R2_PINH.2 SENSOR2.2 SENSOR2.6 SENSOR2.8 U2.17
INT_RTC: R1_PINH1.1 TP15.TP U2.8 U3.3
IO/BOOT: BOOT_BUTTON.3 BOOT_BUTTON.4 C6.1 R_BOOT.2 U2.15
IO/CHANGE: C10.1 CHANGE_BUTTON.3 CHANGE_BUTTON.4 R_CHANGE.2 U2.23
MISO: D12.1 J4.P7 R8.1 TP6.TP U1.2 U2.27
MOSI: D11.1 J1.14 J4.P3 R7.1 TP7.TP U1.5 U2.7
N$1: J2.B5 R2-USB.1
N$2: J2.A5 R2-USB1.2
N$3: C1_BAT1.1 D2.1 IC4.1 IC4.3 Q1.2
N$4: C4.1 D3\.2 D4.1
N$5: EPD_C10.1 J1.22
N$6: EPD_C5.1 J1.15
N$7: CHG_LED.C R1_BAT.2
N$8: MCP73831.1 R1_BAT.1
N$9: EPD_C8.1 J1.20
N$10: MCP73831.5 R2_BAT.2
N$11: EPD_C2.1 J1.5
N$12: D7.1 R_CAPACITOR.2
N$13: C_DELAY.1 IC1.5
N$15: EPD_C12.1 J1.24
N$16: EPD_C7.1 J1.19
N$17: EPD_C1.1 J1.4
N$18: EPD_C6.1 J1.18
PREVGH: D5.1 EPD_C9.1 J1.21
PREVGL: D4.2 EPD_C11.1 J1.23
RESE: J1.3 Q3.2 R3.1
RESE': R2.2 R3.2 SJ1.2
RESET: C5.1 IC1.1 R_RESET.2 RESET_BUTTON.3 RESET_BUTTON.4 U2.3
RTC_RST: U2.16 U3.4
RX: TP2.TP U2.24
SCK: D10.1 J1.13 J4.P5 R6.1 TP8.TP U1.6 U2.6
SCL: J3.4 R2_PINH.1 SENSOR2.4 U2.20 U3.16 U4.7
SDA: J3.3 R1_PINH.1 SENSOR2.3 U2.19 U3.15 U4.8
SRC: C4.2 D5.2 L1.1 Q3.3
SS_SD: D8.1 J4.P2 R10.1 U2.4
TX: TP1.TP U2.25
USB_D+: D1.1 U2.14
USB_D-: D1.3 U2.13
VBAT [power]: C2_BAT.1 MCP73831.3 Q1.3 TP3.TP U4.2 U4.3
VBUS [power]: C1_BAT.1 C4_USB.1 C5_USB.1 CHG_LED.A D1.5 D2.2 MCP73831.4 PFMF.050.1.2 Q1.1 R1_PWRUSB.2 TP14.TP
VRTC [power]: C8.1 C10_SUPERCAP.2 R_CAPACITOR.1 U3.14
VUSB [power]: J2.A4 J2.A9 J2.B4 J2.B9 PFMF.050.1.1

## Tracks (layer width: path | path; a pad name or v marks a point on that pad's centre or on a via)
3V3  (via drill 0.3)
  Top 0.3: 56.68,103.97 56.68,94.26 56.26,93.83 48.57,93.83 48.04,94.37 48.04,95.11 48.57,95.65 48.78,95.65 IC1.2 | 53.22,107.44 52.63,108.03 52.41,108.03 R_BOOT.1 | 53.22,107.44 56.68,103.97 | 56.68,103.97 63.3,103.97 66.83,107.5 66.83,107.6 67.25,108.03 R_RESET.1 67.36,107.92 78.36,107.92 89.67,96.61 v89.67,59.99 91.81,59.99 R1_PINH1.2 | J4.P4 5.23,90.63 5.76,90.63 8.33,93.19 8.33,99.6 C9.1 8.43,99.7 9.18,99.7 10.36,100.88 R6.2 10.57,100.99 20.28,100.99 26.79,107.5 26.79,107.6 27.22,108.03 R_CHANGE.1 27.33,107.92 27.54,107.71 v28.18,107.71 | v53.27,107.5 53.22,107.44 | U2.2 9.07,29.25 9.07,28.82 12.7,25.19 19.11,25.19 R1.1 19.21,24.98 23.54,20.66 | 23.54,20.66 26.9,17.29 26.9,16.44 TP16.TP | v23.7,20.71 23.59,20.71 23.54,20.66 | v34.27,31.28 34.91,31.92 R5.2 35.12,32.02 35.12,37.15 36.83,38.86 37.26,38.86 U1.3 36.83,38.96 36.51,39.28 36.51,41.74 36.83,42.06 43.02,42.06 43.55,41.53 44.94,41.53 U1.8 45.05,41.42 45.05,40.24 U1.7 44.94,40.14 44.3,39.5 44.3,37.36 45.8,35.87 45.8,26.47 46.97,25.3 46.97,24.02 R8.2 47.08,23.91 51.03,23.91 51.13,24.02 R7.2 51.24,24.02 55.51,24.02 R10.2 55.62,24.12 v68.75,37.26 | 155.53,8.43 155.53,8.22 R2_PINH1.2 | 155.53,8.43 164.29,17.19 164.29,18.36 164.72,18.79 165.25,18.79 J3.2 | C1_BAT2.1 137.07,35.98 134.72,35.98 132.9,34.16 C3.+ 132.8,34.05 129.38,37.47 128.53,37.47 IC4.5 128.42,37.47 v126.61,37.47 | v86.57,61.81 86.57,62.66 D7.2 | v86.15,57.75 86.15,58.28 85.51,58.93 U3.2 | R9.2 73.98,27.86 75.58,27.86 R_CL1.1 75.69,27.97 75.69,33.09 79.74,37.15 81.02,37.15 | 81.02,37.15 81.24,36.94 81.24,35.87 81.02,35.65 80.81,35.65 79.21,34.05 79.21,27.22 Q2.3
  Top 0.3: v81.02,37.26 81.02,37.15 | v154.89,9.18 155.53,8.54 155.53,8.43
  Bottom 0.3: v53.27,107.5 46.86,107.5 46.65,107.71 v28.18,107.71 | v34.27,31.28 v23.7,20.71 | 86.57,59.99 86.57,58.18 v86.15,57.75 86.15,51.67 85.4,50.92 85.4,41.63 | 86.57,59.99 v86.57,61.81 | 86.57,59.99 v89.67,59.99 | 85.4,41.63 v81.02,37.26 v68.75,37.26 | 85.4,41.63 85.51,41.63 89.67,37.47 v126.61,37.47 v154.89,9.18
32KHZ  (via drill 0.3)
  Top 0.3: v97.36,49.64 140.8,6.19 154.89,6.19 155.11,6.41 155.11,6.51 155.43,6.83 R2_PINH1.1 | v90.74,55.3 90.42,55.3 86.79,58.93 U3.1 | v50.17,57.97 29.25,37.04 25.3,37.04 17.93,29.68 17.93,29.36 U2.9
  Bottom 0.3: v97.36,49.64 97.25,49.64 97.14,49.53 96.5,49.53 v90.74,55.3 90.74,60.31 88.28,62.77 86.15,62.77 81.34,57.97 v50.17,57.97
DN
  Top 0.3: J2.A7 164.5,54.66 165.04,54.66 165.36,54.34 165.36,53.91 165.04,53.59 164.5,53.59 J2.B7 164.29,53.59 163.43,53.59 158.42,48.57 151.91,48.57 D1.4
DP
  Top 0.3: 163.54,54.34 163.75,54.12 164.4,54.12 J2.A6 | 163.54,54.34 163.54,54.87 163.75,55.08 164.4,55.08 J2.B6 | 163.54,54.34 155,54.34 151.91,51.24 151.91,50.49 D1.6
EPD_3V3  (via drill 0.3)
  Top 0.3: v80.81,17.51 80.81,16.23 J1.16 | 80.81,26.26 80.81,26.79 81.02,27.01 C7.1 81.13,27.22 82.2,28.29 82.2,28.93 L1.2 | 80.81,26.26 v80.81,22.31 | 80.81,26.26 77.18,26.26 Q2.2 | v56.9,16.33 32.99,16.33 TP17.TP
  Bottom 0.3: v80.81,22.31 v80.81,17.51 80.7,17.51 79.53,16.33 v56.9,16.33
EPD_3V3_C  (via drill 0.3)
  Top 0.3: v75.69,25.83 75.69,26.47 R_CL1.2 | v77.07,27.22 77.07,28.07 Q2.1 | v28.72,38 20.5,46.22 20.5,46.76 U2.18 | v122.44,12.38 125.11,12.38 TP13.TP
  Bottom 0.3: v28.72,38 29.36,38 50.07,17.29 67.04,17.29 75.58,25.83 v75.69,25.83 v77.07,27.22 77.29,27.22 92.12,12.38 v122.44,12.38
EPD_BUSY  (via drill 0.3)
  Top 0.3: v84.33,16.97 84.33,16.23 J1.9 | v86.36,13.45 84.97,13.45 82.3,10.78 24.55,10.78 6.94,28.39 6.94,37.04 12.81,42.91 12.81,43.87 10.36,46.33 10.36,46.76 U2.26 10.36,46.86 10.36,49.74 13.66,53.05 13.66,57.97 TP9.TP
  Bottom 0.3: v84.33,16.97 84.33,15.59 86.36,13.56 v86.36,13.45
EPD_CS  (via drill 0.3)
  Top 0.3: v82.73,18.04 82.73,16.23 J1.12 | v74.51,23.7 73.76,24.45 D6.1 73.87,24.55 73.87,26.37 R9.1 73.76,26.47 v73.12,27.11 | v44.84,29.04 43.55,27.75 21.56,27.75 20.5,28.82 20.5,29.25 U2.11 | v89.67,12.38 114.86,12.38 TP10.TP
  Bottom 0.3: v74.51,23.7 80.17,23.7 82.73,21.14 v82.73,18.04 84.01,18.04 v89.67,12.38 | v44.84,29.04 71.2,29.04 v73.12,27.11
EPD_DC  (via drill 0.3)
  Top 0.3: v83.27,15.16 83.27,16.12 J1.11 | v116.57,11.32 117.53,12.28 TP11.TP | v16.01,25.73 12.92,28.82 12.92,29.25 U2.5
  Bottom 0.3: v116.57,11.32 87.11,11.32 v83.27,15.16 83.16,15.16 81.24,13.24 29.14,13.24 16.65,25.73 v16.01,25.73
EPD_RST  (via drill 0.3)
  Top 0.3: v84.01,15.16 83.8,15.37 83.8,16.12 J1.10 | v119.77,11.85 120.63,11.85 121.06,12.28 TP12.TP | v18.68,32.45 18.68,43.77 16.65,45.8 16.65,46.76 U2.21
  Bottom 0.3: v119.77,11.85 87.22,11.85 85.83,13.24 85.83,13.34 v84.01,15.16 84.01,15.27 83.37,15.91 58.39,15.91 58.28,15.8 50.92,15.8 34.27,32.45 v18.68,32.45
FLASH_CS
  Top 0.3: 36.83,30.64 37.58,30.64 D9.1 | 36.83,30.64 35.12,30.64 R5.1 34.91,30.64 32.45,28.18 22.42,28.18 21.78,28.82 21.78,29.25 U2.12 | 36.83,30.64 36.83,33.2 38.43,34.8 38.43,40.14 37.36,41.21 37.36,41.42 U1.1
GDR
  Top 0.3: 72.32,13.93 69.6,16.65 R4.1 | 72.32,13.93 73.34,12.92 83.8,12.92 84.87,13.98 86.25,13.98 87.86,15.59 87.86,16.12 J1.2 | 72.32,13.93 69.6,11.21 65.22,11.21 64.58,11.85 64.58,15.37 65.86,16.65 65.86,17.08 Q3.1
GND  (via drill 0.3)
  Top 0.3: 84.49,47.66 82.94,49.21 82.94,49.64 U3.13 | 84.49,47.66 85.4,46.76 86.79,46.76 87.53,47.5 C8.2 | 89.56,45.8 92.23,48.47 92.23,49.74 93.73,51.24 93.73,51.56 C10_SUPERCAP.1 93.83,51.24 98.1,51.24 101.2,48.14 117.75,48.14 118.49,48.89 C1_BAT.2 118.71,48.89 120.52,48.89 125.33,44.09 127.03,44.09 R2_BAT.1 127.14,43.98 127.99,43.98 130.66,46.65 | 89.56,45.8 83.8,45.8 83.48,46.12 83.48,46.65 84.49,47.66 | 130.66,46.65 130.66,47.4 130.13,47.93 129.7,47.93 MCP73831.2 | 148.06,49.53 147.31,50.28 146.14,50.28 C4_USB.2 | 148.38,49.53 149.34,49.53 D1.2 | 148.38,49.53 148.06,49.53 | U4.9 138.13,49.1 138.13,48.89 137.6,48.36 137.28,48.36 U4.4 137.17,48.25 137.17,46.54 136.11,45.48 135.04,45.48 133.86,46.65 130.66,46.65 | U4.9 138.24,48.89 139.09,48.89 U4.6 139.31,48.89 139.63,48.89 140.16,48.36 147.21,48.36 148.06,49.21 148.06,49.53 | U4.9 138.03,49.21 138.03,49.53 137.71,49.85 137.28,49.85 U4.1 137.07,49.85 133.54,49.85 C2_BAT.2 | SENSOR2.1 154.36,13.77 154.36,11.96 155.11,11.21 155.11,10.99 SENSOR2.7 155.21,10.78 155.21,10.46 155.64,10.03 156.28,10.03 156.71,10.46 156.71,10.78 SENSOR2.5 156.82,10.99 156.82,12.7 164.29,20.18 164.29,21.35 164.5,21.56 166.32,21.56 | C1.2 156.6,8.11 157.78,8.11 C2.2 157.99,8.22 157.99,10.25 165.25,17.51 165.25,17.83 J3.1 165.36,17.93 165.68,17.93 166.85,19.11 166.85,21.03 166.32,21.56 | 166.32,21.56 166.32,29.78 167.6,31.06 167.6,32.56 TP5.TP 167.49,32.77 167.49,36.19 TP4.TP 167.49,36.3 167.49,49.21 | R1_PWRUSB.1 121.91,35.65 122.66,34.91 122.66,34.8 123.51,33.95 123.94,33.95 C1_BAT1.2 124.04,33.73 124.68,33.09 125.75,33.09 126.5,33.84
  Top 0.3: 126.5,33.84 126.5,35.98 125.97,36.51 125.75,36.51 IC4.2 | C3.- 132.9,37.04 133.12,37.26 137.07,37.26 C1_BAT2.2 137.17,37.15 137.92,36.4 | 126.5,33.84 130.45,33.84 131.62,32.67 134.93,32.67 137.92,35.65 137.92,36.4 | 151.37,46.76 152.65,45.48 R2-USB.2 | 151.37,46.76 151.26,46.86 R2-USB1.1 | v153.4,51.45 153.51,51.45 154.15,52.09 C5_USB.2 | R2-USB1.1 151.26,46.97 v151.91,47.61 162.26,47.61 164.4,49.74 J2.MP3 | J2.B12 164.4,51.24 164.4,51.03 J2.A1 164.5,50.92 164.5,49.74 164.93,49.32 J2.MP3 | 167.49,49.21 165.04,49.21 J2.MP3 | 167.49,49.21 168.88,49.21 J2.MP1 168.88,49.32 168.88,59.35 J2.MP2 168.88,59.46 165.04,59.46 J2.MP4 164.93,59.46 164.4,58.93 164.4,57.86 J2.A12 164.4,57.65 164.4,57.43 J2.B1 | 137.92,36.4 144.22,36.4 150.52,42.7 150.52,45.9 151.37,46.76 | 151.37,46.76 R2-USB1.1 | v148.38,49.42 148.38,49.53 | D8.2 55.08,28.93 54.98,28.82 51.35,28.82 D11.2 51.24,28.93 46.86,28.93 D12.2 46.76,29.14 v46.76,30.42 | v37.9,38.22 37.36,37.68 U1.4 37.15,37.68 v36.4,37.68 | U1.9 41.1,39.5 39.82,38.22 v39.07,38.22 39.07,34.8 | 39.07,34.8 37.68,33.41 37.68,32.13 D9.2 | 80.28,15.69 80.28,16.12 J1.17 | 80.28,15.69 81.34,14.62 84.23,14.62 84.76,15.16 | 84.76,15.16 84.76,16.12 J1.8 | 89.24,14.09 89.24,17.93 86.25,20.92 EPD_C1.2 86.15,21.03 84.97,21.03 EPD_C2.2 84.87,21.03 83.69,21.03 EPD_C5.2 83.58,21.03 82.41,21.03 EPD_C6.2 | 89.24,14.09 89.24,13.77 J1.MP1 | v86.04,15.16 84.76,15.16 | 89.24,14.09 v87.11,14.09 | EPD_C8.2 79.42,21.03 80.81,21.03 EPD_C7.2 81.02,21.03 82.2,21.03 EPD_C6.2 | EPD_C6.2 82.3,21.03 82.3,27.01 C7.2 82.52,27.11 84.01,27.11 85.4,28.5 88.5,28.5
  Top 0.3: 88.5,28.5 89.24,28.5 D3\.1 | 71.1,21.35 70.56,21.88 70.14,21.88 69.39,21.14 69.39,19.86 EPD_C12.2 69.17,19.75 68.32,19.75 66.5,17.93 65.44,17.93 64.05,16.55 | 71.1,21.35 71.1,19.96 EPD_C11.2 | EPD_C9.2 77.61,21.03 75.9,21.03 EPD_C10.2 75.9,21.14 75.26,21.78 | 75.26,21.78 75.26,24.45 D6.2 | 71.1,21.35 74.72,21.35 75.15,21.78 75.26,21.78 | SJ1.1 65.54,12.7 65.54,12.49 66.4,11.64 67.68,11.64 68.21,12.17 69.28,12.17 R2.1 69.39,12.38 v71.2,14.2 | 72.43,15.11 70.88,16.65 R4.2 | 72.43,15.11 73.76,13.77 75.69,13.77 J1.MP2 | 72.43,15.11 v72.16,14.84 | v64.05,14.84 64.05,16.55 | v79.53,14.84 80.28,15.59 80.28,15.69 | 39.07,34.8 39.82,34.8 45.37,29.25 45.37,22.95 49.96,18.36 62.13,18.36 63.94,16.55 64.05,16.55 | CHANGE_BUTTON.2 25.73,108.14 22.31,108.14 CHANGE_BUTTON.1 22.2,108.03 20.92,109.31 20.39,109.31 C10.2 20.28,109.2 16.55,109.2 8.43,101.09 C9.2 8.33,100.88 7.69,100.88 2.56,95.75 J4.G4 2.56,95.54 2.56,95.11 4.8,92.87 5.12,92.87 J4.P6 4.8,92.77 1.49,89.46 1.49,82.62 J4.G3 1.6,82.41 7.15,76.86 | 54.23,97.25 51.13,97.25 50.92,97.04 50.92,96.5 49.21,94.79 48.89,94.79 IC1.3 | 54.23,97.25 55.62,95.86 C_DELAY.2 | RESET_BUTTON.2 65.65,108.14 62.34,108.14 RESET_BUTTON.1 62.23,108.14 62.02,108.14 60.85,109.31 C5.2 60.74,109.2 53.48,109.2 52.95,108.67 51.35,108.67 50.81,108.14 BOOT_BUTTON.2 | BOOT_BUTTON.1 47.18,108.14 46.97,108.14 45.8,109.31 C6.2 45.69,109.31 44.94,108.56 44.94,107.6 | 44.94,107.6 45.9,106.64 48.14,106.64 49.53,108.03 50.71,108.03 BOOT_BUTTON.2 | 54.23,97.25 54.23,101.31 56.26,103.33 56.26,103.76 52.63,107.39 51.56,107.39 50.92,108.03 BOOT_BUTTON.2
  Top 0.3: 13.88,98.53 13.88,93.09 15.69,91.27 J4.G2 15.8,91.17 16.65,90.31 16.65,87.32 15.8,86.47 15.8,85.61 J4.G1 15.69,85.4 7.15,76.86 | 13.88,98.53 13.88,99.28 D10.2 | U2.29_9 14.62,37.79 13.56,37.79 U2.29_6 13.34,37.68 12.38,37.68 U2.29_3 | U2.29_8 14.73,36.4 14.73,35.33 U2.29_7 14.62,35.33 13.56,35.33 U2.29_4 | U2.29_1 12.28,35.33 12.28,36.4 U2.29_2 12.28,36.62 12.28,37.68 U2.29_3 | U2.29_4 13.45,35.33 12.38,35.33 U2.29_1 | U2.29_5 13.45,36.4 13.45,35.44 U2.29_4 | U2.1 7.79,29.36 7.79,32.24 10.78,35.23 12.06,35.23 U2.29_1 | 7.15,76.86 7.69,76.33 7.69,46.86 U2.28 7.79,46.65 v7.79,43.77 | v12.17,39.39 12.17,37.9 U2.29_3 | 44.94,107.6 28.82,107.6 19.75,98.53 13.88,98.53 | v89.56,44.19 89.56,45.8 | v89.88,38 89.88,34.16 88.5,32.77 88.5,28.5
  Bottom 0.3: v153.4,51.45 153.4,49.1 v151.91,47.61 151.8,47.61 149.98,49.42 v148.38,49.42 | v37.9,38.22 v39.07,38.22 39.07,38.11 v46.76,30.42 | v87.11,14.09 v86.04,15.16 | v64.05,14.84 70.45,14.84 71.1,14.2 v71.2,14.2 71.52,14.2 v72.16,14.84 v79.53,14.84 | v7.79,43.77 v12.17,39.39 12.28,39.39 13.34,38.32 18.47,38.32 19.11,38.96 29.68,38.96 30.96,37.68 v36.4,37.68 | v89.56,44.19 89.56,38.32 v89.88,38
  pour Top: 6.26,28.96 6.24,28.94 6.22,28.92 0.08,28.92 0.08,0.08 73.92,0.08 73.92,10.02 73.94,10.04 73.96,10.06 73.98,10.08 92.28,10.08 92.31,10.06 92.33,10.04 92.35,10.02 92.35,0.08 170.12,0.08 170.12,67.16 92.25,67.16 92.23,67.18 92.2,67.2 92.19,67.23 92.19,111.12 69.18,111.12 69.18,110.38 69.16,110.36 69.14,110.34 69.12,110.32 18.28,110.32 18.26,110.34 18.24,110.36 18.22,110.38 18.22,111.12 0.08,111.12 0.08,47.08 6.22,47.08 6.24,47.06 6.26,47.04 6.28,47.02 6.28,28.98
  pour Bottom: 6.26,28.96 6.24,28.94 6.22,28.92 0.08,28.92 0.08,0.08 73.92,0.08 73.92,10.02 73.94,10.04 73.96,10.06 73.98,10.08 92.28,10.08 92.31,10.06 92.33,10.04 92.35,10.02 92.35,0.08 170.12,0.08 170.12,67.16 92.25,67.16 92.23,67.18 92.2,67.2 92.19,67.23 92.19,111.12 69.18,111.12 69.18,110.38 69.16,110.36 69.14,110.34 69.12,110.32 18.28,110.32 18.26,110.34 18.24,110.36 18.22,110.38 18.22,111.12 0.08,111.12 0.08,47.08 6.22,47.08 6.24,47.06 6.26,47.04 6.28,47.02 6.28,28.98
GPIO8
  Top 0.3: R1.2 19.21,26.47 19.21,29.25 U2.10
I2C_PW  (via drill 0.3)
  Top 0.3: SENSOR2.6 155.85,10.89 155.85,12.7 155.21,13.34 155.21,13.77 SENSOR2.2 155.11,13.88 155.11,14.2 154.68,14.62 154.04,14.62 153.72,14.3 | C2.1 157.78,6.83 156.6,6.83 C1.1 156.5,6.94 156.28,7.15 156.28,7.26 156.07,7.47 154.89,7.47 154.36,8.01 R1_PINH.2 154.36,8.22 154.36,10.78 SENSOR2.8 154.36,10.99 153.72,11.64 153.72,14.3 | v84.01,46.33 87.64,46.33 90.63,49.32 90.95,49.32 R2_PINH.2 91.06,49.32 v91.7,48.68 | v25.51,46.33 24.87,45.69 22.42,45.69 21.78,46.33 21.78,46.76 U2.17 | v153.19,14.3 153.72,14.3
  Bottom 0.3: v25.51,46.33 v84.01,46.33 | v153.19,14.3 150.52,14.3 116.57,48.25 92.12,48.25 v91.7,48.68
INT_RTC
  Top 0.3: U2.8 16.65,29.36 16.65,29.68 24.45,37.47 28.93,37.47 49.96,58.5 76.65,58.5 77.5,57.65 83.27,57.65 84.01,58.39 84.01,58.93 U3.3 84.12,59.03 83.69,59.46 83.69,63.2 83.91,63.41 87.11,63.41 87.32,63.2 87.32,61.59 90.2,58.71 91.81,58.71 R1_PINH1.1 92.02,58.71 92.77,59.46 149.45,59.46 TP15.TP
IO/BOOT  (via drill 0.3)
  Top 0.3: R_BOOT.2 52.31,109.42 50.92,109.42 50.81,109.53 BOOT_BUTTON.3 50.71,109.53 49.1,109.53 48.36,108.78 48.25,108.78 | 46.44,107.28 46.22,107.5 46.22,107.6 45.8,108.03 C6.1 | 46.44,107.28 48.14,107.28 48.25,107.39 48.25,108.78 | 48.25,108.78 47.5,109.53 47.29,109.53 BOOT_BUTTON.4 | v25.09,46.76 24.34,46.76 U2.15 | v46.44,107.18 46.44,107.28
  Bottom 0.3: v25.09,46.76 19.54,46.76 17.08,44.3 16.65,44.3 16.33,44.62 16.33,77.07 v46.44,107.18
IO/CHANGE  (via drill 0.3)
  Top 0.3: R_CHANGE.2 27.22,109.42 25.94,109.42 25.83,109.53 CHANGE_BUTTON.3 25.62,109.63 24.12,109.63 23.38,108.89 v23.27,108.89 22.63,109.53 22.31,109.53 CHANGE_BUTTON.4 | v21.14,107.5 20.6,108.03 20.39,108.03 C10.1 | v14.09,51.45 14.09,46.86 U2.23
  Bottom 0.3: v23.27,108.89 21.88,107.5 v21.14,107.5 21.14,107.39 14.09,100.34 v14.09,51.45
MISO  (via drill 0.3)
  Top 0.3: v46.22,25.3 46.22,23.38 46.97,22.63 R8.1 | v46.33,26.69 46.33,27.01 46.76,27.43 D12.1 46.97,27.54 48.68,25.83 55.51,25.83 68.64,38.96 100.45,38.96 133.65,5.76 157.99,5.76 167.28,15.05 167.28,22.52 167.92,23.16 167.92,29.57 TP6.TP | v37.36,39.6 37.36,40.14 U1.2 | v12.28,43.13 9.07,46.33 9.07,46.76 U2.27 | v6.94,92.55 5.66,93.83 5.44,93.83 J4.P7
  Bottom 0.3: v46.22,25.3 46.22,26.58 v46.33,26.69 46.33,26.79 37.36,35.76 v37.36,39.6 37.26,39.6 33.73,43.13 13.56,43.13 | 13.56,43.13 v12.28,43.13 | v6.94,92.55 6.94,89.46 13.56,82.84 13.56,43.13
MOSI  (via drill 0.3)
  Top 0.3: v6.51,89.14 6.19,89.46 5.44,89.46 J4.P3 | v13.02,80.49 13.02,68.21 13.98,67.25 TP7.TP | 52.09,26.47 55.51,26.47 55.94,26.9 55.94,29.68 48.04,37.58 45.16,37.58 U1.5 | 52.09,26.47 51.35,27.22 D11.1 | v81.45,15.37 81.77,15.69 81.77,16.12 J1.14 | v58.61,15.37 v56.15,17.83 49.85,17.83 41.95,25.73 18.47,25.73 15.37,28.82 15.37,29.25 U2.7 15.48,29.25 v15.48,39.28 | v51.88,22.1 51.24,22.74 R7.1 | v52.09,26.37 52.09,26.47
  Bottom 0.3: v6.51,89.14 6.51,87 v13.02,80.49 13.02,44.62 11.74,43.34 11.74,42.91 15.37,39.28 v15.48,39.28 | v58.61,15.37 v81.45,15.37 | v56.15,17.83 v51.88,22.1 51.88,22.2 52.09,22.42 v52.09,26.37
N$1  (via drill 0.3)
  Top 0.3: v151.05,44.62 151.16,44.73 151.16,45.37 R2-USB.1 | v163.43,55.83 163.65,56.04 164.4,56.04 J2.B5
  Bottom 0.3: v151.05,44.62 152.23,44.62 v163.43,55.83
N$2  (via drill 0.3)
  Top 0.3: v157.56,46.97 152.55,46.97 R2-USB1.2 | v163.43,52.84 163.65,53.05 164.4,53.05 J2.A5
  Bottom 0.3: v163.43,52.84 v157.56,46.97
N$3
  Top 0.3: 125.33,35.23 125.33,33.95 C1_BAT1.1 | 125.33,35.23 125.64,35.55 IC4.3 | 125.33,35.23 124.9,35.23 | 124.9,35.23 123.51,35.23 D2.1 | 124.9,35.23 124.9,36.94 125.43,37.47 125.64,37.47 IC4.1 125.75,37.58 126.28,38.11 129.81,38.11 135.79,44.09 136.43,44.09 Q1.2
N$4
  Top 0.3: C4.1 96.82,32.02 96.29,32.02 92.87,28.61 D3\.2 92.77,28.72 89.46,32.02 89.46,32.24 D4.1
N$5
  Top 0.3: J1.22 77.82,16.23 77.82,17.72 75.9,19.64 EPD_C10.1
N$6
  Top 0.3: J1.15 81.34,16.23 81.34,17.4 83.58,19.64 EPD_C5.1
N$7
  Top 0.3: CHG_LED.C 123.83,48.89 123.83,48.04 124.9,46.97 R1_BAT.2
N$8
  Top 0.3: R1_BAT.1 123.72,46.86 124.47,46.12 125.43,46.12 126.18,46.86 126.18,47.5 126.28,47.61 128.74,47.61 129.27,47.08 129.59,47.08 MCP73831.1
N$9  (via drill 0.3)
  Top 0.3: v76.22,17.29 76.22,15.8 76.54,15.48 78.57,15.48 78.78,15.69 78.78,16.12 J1.20 | v78.46,19.54 79.21,19.54 79.31,19.64 EPD_C8.1
  Bottom 0.3: v78.46,19.54 v76.22,17.29
N$10
  Top 0.3: R2_BAT.2 127.14,45.26 127.14,46.97 MCP73831.5
N$11
  Top 0.3: J1.5 86.25,16.23 86.25,18.36 84.97,19.64 EPD_C2.1
N$12
  Top 0.3: D7.1 84.55,62.66 86.25,60.95 R_CAPACITOR.2
N$13
  Top 0.3: IC1.5 51.77,96.61 53.59,96.61 55.62,94.58 C_DELAY.1
N$15  (via drill 0.3)
  Top 0.3: v76.75,16.97 76.75,16.23 J1.24 | v70.14,18.04 69.81,18.04 69.39,18.47 EPD_C12.1
  Bottom 0.3: v76.75,16.97 76.54,16.76 71.42,16.76 v70.14,18.04
N$16
  Top 0.3: J1.19 79.31,16.23 79.31,18.15 80.81,19.64 EPD_C7.1
N$17
  Top 0.3: J1.4 86.79,16.23 86.79,19.11 86.25,19.64 EPD_C1.1
N$18
  Top 0.3: J1.18 79.85,16.23 79.85,17.29 82.2,19.64 EPD_C6.1
PREVGH
  Top 0.3: J1.21 78.36,16.23 78.36,18.89 77.61,19.64 EPD_C9.1 77.71,19.75 78.46,20.5 78.46,21.46 76.33,23.59 76.33,31.81 80.28,35.76 80.28,36.3 D5.1
PREVGL  (via drill 0.3)
  Top 0.3: J1.23 77.29,16.23 77.29,17.19 75.9,18.57 71.2,18.57 EPD_C11.1 70.99,18.68 70.35,19.32 v70.35,21.35 | v90.42,32.24 92.87,32.24 D4.2
  Bottom 0.3: v90.42,32.24 81.24,32.24 v70.35,21.35
RESE
  Top 0.3: J1.3 87.32,16.12 87.32,15.69 86.04,14.41 84.65,14.41 84.44,14.2 76.33,14.2 73.02,17.51 67.57,17.51 67.25,17.19 Q3.2 67.04,17.08 65.97,16.01 65.97,15.48 R3.1
RESE'
  Top 0.3: R3.2 67.15,15.37 67.15,12.92 67.04,12.81 SJ1.2 67.25,13.56 69.28,13.56 R2.2
RESET  (via drill 0.3)
  Top 0.3: R_RESET.2 67.25,109.42 65.86,109.42 65.76,109.53 RESET_BUTTON.3 65.65,109.63 63.41,109.63 | 63.41,109.63 62.34,109.63 RESET_BUTTON.4 | v55.72,103.55 48.89,96.72 IC1.1 | v59.99,107.82 60.53,107.82 60.74,108.03 C5.1 | v10.36,34.05 10.36,29.36 U2.3 | v16.87,44.84 v10.36,38.32 | v63.41,109.53 63.41,109.63
  Bottom 0.3: v10.36,38.32 v10.36,34.05 | v16.87,44.84 16.87,64.58 55.72,103.44 v55.72,103.55 v59.99,107.82 60.1,107.82 61.81,109.53 v63.41,109.53
RTC_RST
  Top 0.3: U2.16 23.06,46.86 23.06,47.18 36.19,60.31 82.09,60.31 82.84,59.57 82.84,59.03 U3.4
RX
  Top 0.3: U2.24 12.92,46.86 12.92,51.03 54.87,92.98 68.85,92.98 77.07,101.2 TP2.TP
SCK  (via drill 0.3)
  Top 0.3: D10.1 15.27,99.38 14.52,100.13 13.13,100.13 12.7,99.7 10.46,99.7 R6.1 10.36,99.6 10.36,90.74 6.3,86.68 6.19,86.68 | 6.19,86.68 4.48,86.68 4.06,87.11 4.06,91.06 4.7,91.7 5.34,91.7 J4.P5 | v8.22,67.79 13.98,62.02 TP8.TP | v8.22,84.55 6.19,86.57 6.19,86.68 | v82.09,15.27 82.3,15.48 82.3,16.12 J1.13 | v14.95,28.07 14.09,28.93 U2.6 | 32.4,38.27 24.87,30.74 v24.87,30.64 | 32.4,38.27 36.62,42.49 45.16,42.49 45.9,41.74 45.9,39.92 45.16,39.18 45.16,38.96 U1.6 | v32.45,38.22 32.4,38.27
  Bottom 0.3: v8.22,84.55 v8.22,67.79 8.22,45.8 15.27,38.75 18.25,38.75 18.89,39.39 31.28,39.39 v32.45,38.22 | v82.09,15.27 80.49,13.66 29.36,13.66 18.63,24.39 | v14.95,28.07 18.63,24.39 | 18.63,24.39 v24.87,30.64
SCL  (via drill 0.3)
  Top 0.3: v140.38,48.89 139.95,49.32 139.74,49.32 139.63,49.42 139.2,49.42 U4.7 | v140.38,30.53 156.71,14.2 156.71,13.88 SENSOR2.4 156.82,14.2 v163.43,20.82 | v166.32,20.82 165.36,20.82 J3.4 | 87.48,50.44 86.79,49.74 U3.16 | 87.48,50.44 87.64,50.6 90.95,50.6 R2_PINH.1 91.06,50.6 91.59,50.07 v91.81,50.07 | v21.67,50.92 17.93,47.18 17.93,46.86 U2.20 | v84.87,50.92 85.4,51.45 86.47,51.45 87.48,50.44
  Bottom 0.3: v140.38,30.53 140.38,48.68 | 140.38,48.68 v140.38,48.89 | v163.43,20.82 v166.32,20.82 | v84.87,50.92 v21.67,50.92 | 140.38,48.68 93.19,48.68 v91.81,50.07
SDA  (via drill 0.3)
  Top 0.3: v139.95,49.85 139.84,49.96 139.2,49.96 U4.8 | SENSOR2.3 155.85,13.88 155.85,14.2 v155.32,14.73 155.21,14.73 154.89,15.05 153.19,15.05 152.65,14.52 152.65,8.43 154.25,6.83 R1_PINH.1 | v164.18,19.32 164.72,19.86 165.25,19.86 J3.3 | v29.46,57.43 19.21,47.18 19.21,46.86 U2.19 | v86.15,50.92 86.15,50.39 85.51,49.74 U3.15
  Bottom 0.3: v155.32,14.73 155.32,19.75 | 155.32,19.75 155.32,34.69 140.16,49.85 v139.95,49.85 129.91,49.85 129.17,49.1 96.18,49.1 90.31,54.98 90.2,54.98 | v29.46,57.43 81.45,57.43 86.36,62.34 88.07,62.34 90.2,60.21 90.2,54.98 | v86.15,50.92 90.2,54.98 | v164.18,19.32 164.07,19.32 163.65,19.75 155.32,19.75
SRC
  Top 0.3: C4.2 96.82,33.41 95.22,33.41 90.1,38.54 86.04,38.54 83.91,36.4 D5.2 | Q3.3 66.61,19.32 66.61,24.66 79.74,37.79 82.52,37.79 83.8,36.51 D5.2 | L1.1 82.3,33.63 82.3,34.8 83.8,36.3 D5.2
SS_SD  (via drill 0.3)
  Top 0.3: v54.76,23.48 54.87,23.48 55.51,22.84 R10.1 | v54.34,27.01 54.66,27.01 55.08,27.43 D8.1 | v14.95,32.99 11.64,29.68 11.64,29.36 U2.4 | v4.59,88.07 4.91,88.39 5.66,88.39 J4.P2
  Bottom 0.3: v54.76,23.48 54.76,26.58 v54.34,27.01 51.99,27.01 49.74,24.77 43.23,24.77 29.46,38.54 28.5,38.54 22.95,32.99 v14.95,32.99 14.95,34.48 7.26,42.17 7.26,46.54 4.59,49.21 v4.59,88.07
TX
  Top 0.3: U2.25 11.64,46.86 11.64,50.39 54.66,93.41 67.36,93.41 76.54,102.59 81.77,102.59 83.27,101.09 TP1.TP
USB_D+  (via drill 0.3)
  Top 0.3: v99.06,51.03 147.21,51.03 147.74,50.49 149.34,50.49 D1.1 | v96.93,50.07 89.78,42.91 36.4,42.91 24.34,30.85 24.34,29.36 U2.14
  Bottom 0.3: v99.06,51.03 97.89,51.03 v96.93,50.07
USB_D-
  Top 0.3: D1.3 149.34,48.47 147.96,48.47 144.43,44.94 129.59,44.94 127.89,43.23 104.51,43.23 97.14,50.6 96.72,50.6 89.46,43.34 36.19,43.34 23.06,30.21 23.06,29.36 U2.13
VBAT  (via drill 0.3)
  Top 0.3: U4.2 137.17,49.32 137.17,48.89 U4.3 137.07,48.89 136.64,48.89 134.77,47.02 | 134.77,47.02 135.47,46.33 Q1.3 | 134.77,47.02 133.54,48.25 133.54,48.47 C2_BAT.1 133.33,48.57 133.01,48.89 129.7,48.89 MCP73831.3 129.59,49 v128.95,49.64 | v71.74,98.53 71.74,101.31 TP3.TP
  Bottom 0.3: v71.74,98.53 71.74,87.11 109.2,49.64 v128.95,49.64
VBUS  (via drill 0.3)
  Top 0.3: C1_BAT.1 117.32,49 118.07,49.74 124.58,49.74 125.22,49.1 CHG_LED.A 125.33,49 127.03,49 MCP73831.4 127.14,49 128.63,50.49 140.06,50.49 141.44,49.1 146.03,49.1 C4_USB.1 146.25,49.1 v147.21,49.1 | Q1.1 134.5,44.09 130.13,44.09 123.51,37.47 D2.2 123.4,37.36 123.08,37.04 121.91,37.04 R1_PWRUSB.2 121.69,36.94 121.06,36.3 121.06,35.23 124.04,32.24 141.55,32.24 152.12,42.81 PFMF.050.1.2 152.23,42.91 152.23,43.87 153.29,44.94 v153.29,46.44 | 153.45,50.65 152.33,49.53 151.91,49.53 D1.5 | 153.45,50.65 153.61,50.81 154.15,50.81 C5_USB.1 | v152.76,59.03 149.66,62.13 TP14.TP | 153.45,50.65 v152.76,51.35
  Bottom 0.3: 152.76,51.99 v152.76,51.35 149.45,51.35 v147.21,49.1 | 152.76,51.99 v152.76,59.03 | v153.29,46.44 153.29,48.36 153.93,49 153.93,51.67 153.61,51.99 152.76,51.99
VRTC  (via drill 0.3)
  Top 0.3: R_CAPACITOR.1 84.87,60.85 84.87,51.67 84.23,51.03 84.23,49.74 U3.14 84.33,49.64 84.33,49.1 85.83,47.61 86.15,47.61 C8.1 86.25,47.61 v86.89,48.25 | v92.23,47.72 93.73,49.21 93.73,49.42 C10_SUPERCAP.2
  Bottom 0.3: v92.23,47.72 87.43,47.72 v86.89,48.25
VUSB
  Top 0.3: J2.A4 164.4,51.88 164.4,52.09 J2.B9 164.5,52.09 165.04,52.09 165.78,52.84 165.78,55.94 165.14,56.58 164.5,56.58 J2.B4 | J2.B4 164.4,56.68 164.4,56.9 J2.A9 | J2.B4 164.29,56.58 156.6,56.58 150.3,50.28 150.3,46.33 147.74,43.77 147.74,42.91 PFMF.050.1.1